# Altium PCB PCB_Program Counter - 2.0_2021-10-28.pcbdoc
Units mm, origin at the board's own origin, x right, y up, seen from the top; angles counter-clockwise.
Board outline 124.59 x 83.95 mm, 2 copper layers (Top Layer, Bottom Layer); 15 components, 27 nets, 72 pads, 11 vias.
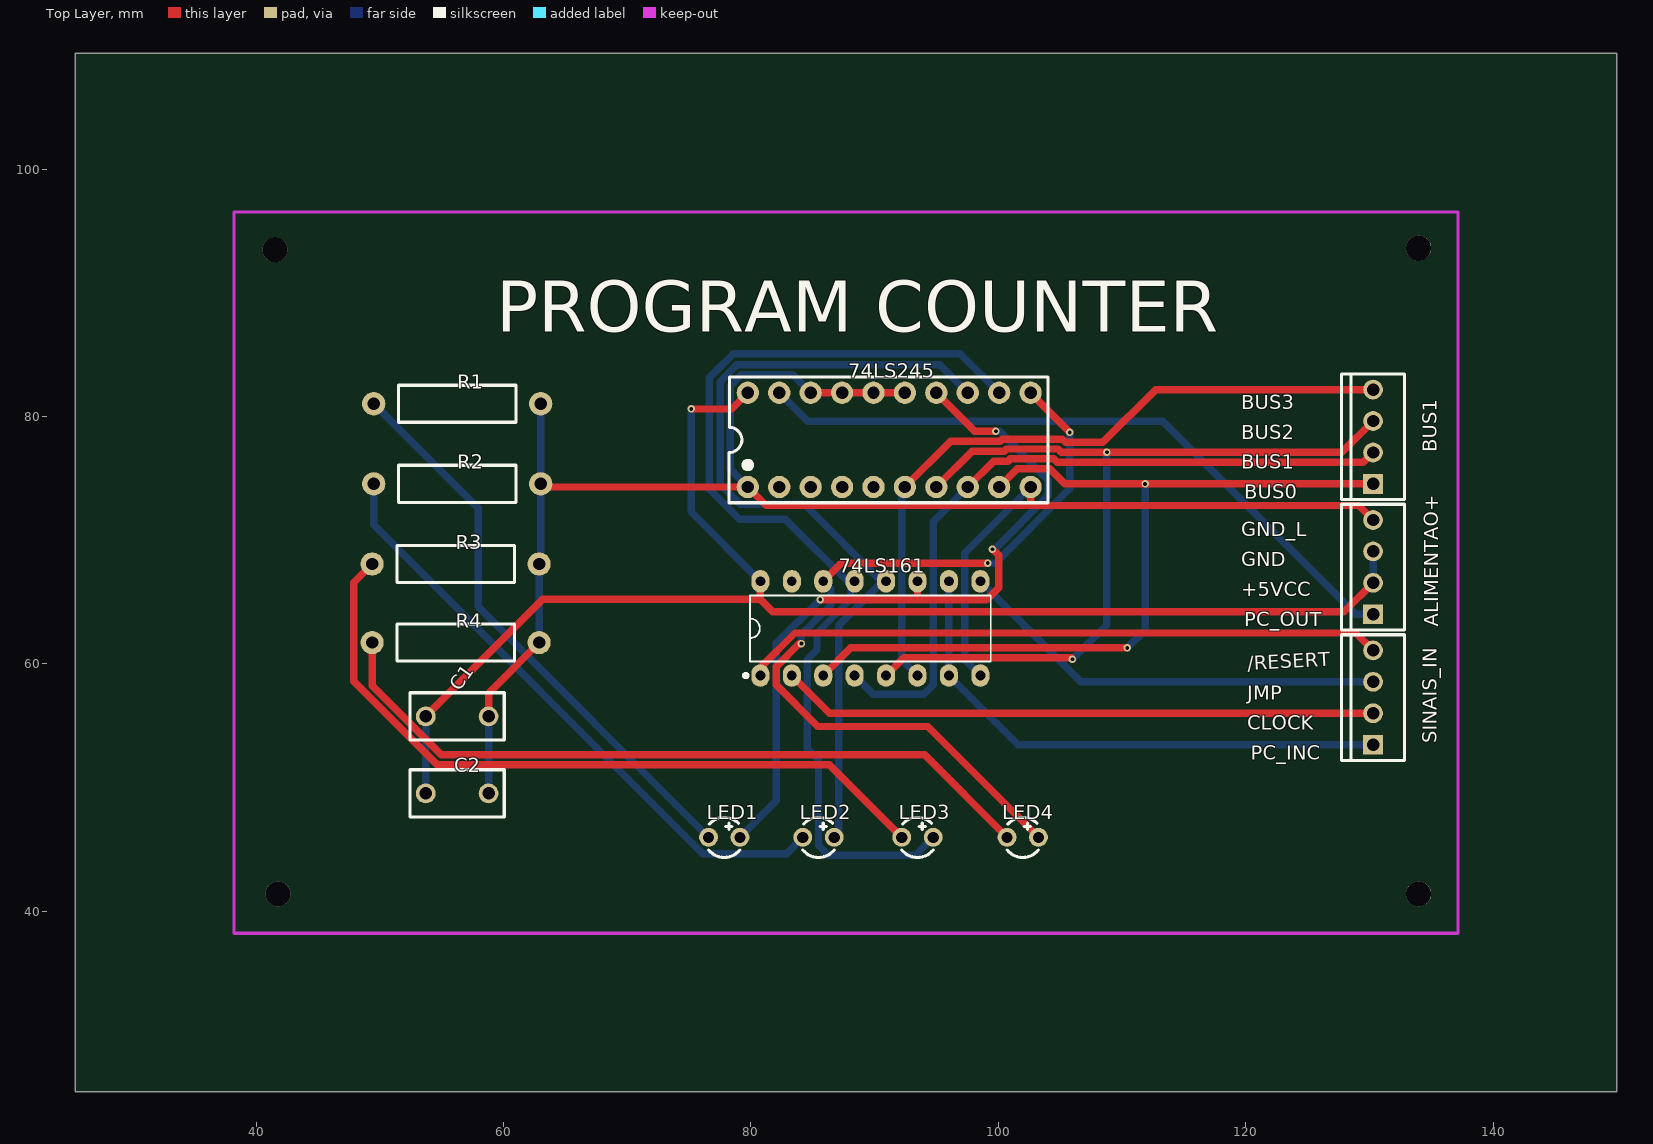
[diagram p0: Top Layer view]
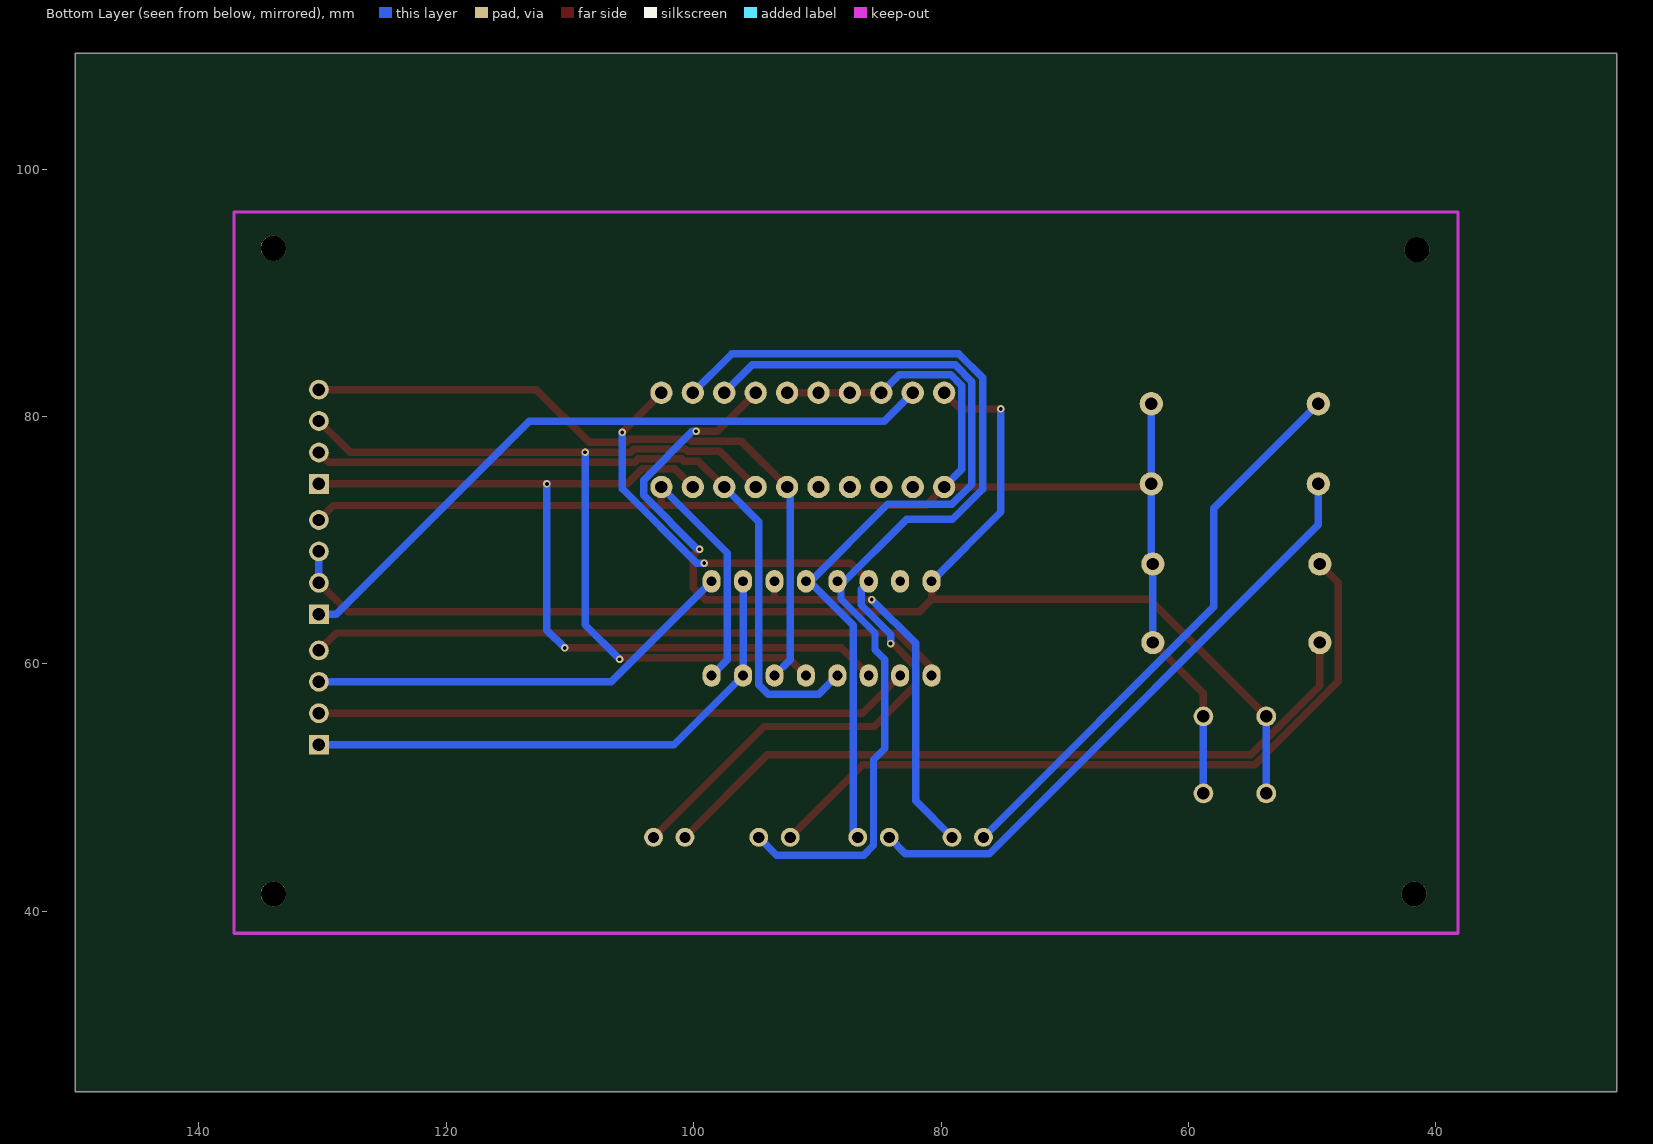
[diagram p1: Bottom Layer view, seen from below]

## Layer stack, top to bottom
Top Layer: signal copper (thickness not stored)
Dielectric: dielectric 0.32, FR-4, Dk 4.8
Bottom Layer: signal copper (thickness not stored)

## Board outline
149.987,25.4 25.4,25.4 25.4,109.347 149.987,109.347

## Components (designator, comment, footprint, x,y, rotation, side; value= is the part's Value field where it differs from the comment)
74LS161 "XD74LS161" DIP-16_L19.2-W6.6-P2.54-LS7.6-BL 89.662,62.865 r0 top
74LS245 "SN74LS245N" DIP-20_L25.5-W10.0-P2.54-LS7.6-BL 91.186,78.105 r0 top
ALIMENTAO+ "171825-4" HDR-TH_4P-P2.54-D1.0 130.302,67.818 r90 top
BUS1 "BUS" HDR-TH_4P-P2.54-D1.0 130.302,78.359 r90 top
C1 "100nF 63V" CAP-TH_L7.6-W3.8-P5.08-D0.51 56.261,55.753 r0 top
C2 "100nF 63V" CAP-TH_L7.6-W3.8-P5.08-D0.51 56.261,49.53 r0 top
LED1 "VERDE" LED-TH_BD3.0-P2.54-RD-GREEN 77.851,45.974 r0 top
LED2 "VERDE" LED-TH_BD3.0-P2.54-RD-GREEN 85.471,45.974 r0 top
LED3 "VERDE" LED-TH_BD3.0-P2.54-RD-GREEN 93.472,45.974 r0 top
LED4 "VERDE" LED-TH_BD3.0-P2.54-RD-GREEN 101.981,45.974 r0 top
R1 "470" RES-TH_BD3.0-L9.5-P13.50-D0.6 56.261,81.026 r0 top
R2 "470" RES-TH_BD3.0-L9.5-P13.50-D0.6 56.261,74.549 r0 top
R3 "470" RES-TH_BD3.0-L9.5-P13.50-D0.6 56.134,68.072 r0 top
R4 "470" RES-TH_BD3.0-L9.5-P13.50-D0.6 56.134,61.722 r0 top
SINAIS_IN "SINAIS IN" HDR-TH_4P-P2.54-D1.0 130.302,57.277 r90 top

## Footprints (in the part's own frame and the unit in brackets; to place one, negate y for a bottom-side part, rotate by r counter-clockwise, add the part's x,y. Pads: shape width x height; smd on the part's side, far side on the other; paste and mask are expansions set on the pad)
CAP-TH_L7.6-W3.8-P5.08-D0.51 [mm]
  round 1.6 hole 1: 1(-2.54,0) 2(2.54,0)
  silkscreen extent -3.81,-1.91 3.81,1.91
DIP-16_L19.2-W6.6-P2.54-LS7.6-BL [mm]
  oval 1.46x1.825 hole 0.8: 1(-8.89,-3.81) 2(-6.35,-3.81) 3(-3.81,-3.81) 4(-1.27,-3.81) 5(1.27,-3.81) 6(3.81,-3.81) 7(6.35,-3.81) 8(8.89,-3.81) 9(8.89,3.81) 10(6.35,3.81) 11(3.81,3.81) 12(1.27,3.81) 13(-1.27,3.81) 14(-3.81,3.81) 15(-6.35,3.81) 16(-8.89,3.81)
  silkscreen extent -10.22,-3.96 9.73,2.67
DIP-20_L25.5-W10.0-P2.54-LS7.6-BL [mm]
  round 1.8 hole 1: 1(-11.43,-3.81) 2(-8.89,-3.81) 3(-6.35,-3.81) 4(-3.81,-3.81) 5(-1.27,-3.81) 6(1.27,-3.81) 7(3.81,-3.81) 8(6.35,-3.81) 9(8.89,-3.81) 10(11.43,-3.81) 11(11.43,3.81) 12(8.89,3.81) 13(6.35,3.81) 14(3.81,3.81) 15(1.27,3.81) 16(-1.27,3.81) 17(-3.81,3.81) 18(-6.35,3.81) 19(-8.89,3.81) 20(-11.43,3.81)
  silkscreen extent -12.95,-5.08 12.83,5.08
HDR-TH_4P-P2.54-D1.0 [mm]
  rect 1.6x1.6 hole 1: 1(-3.81,0)
  round 1.6 hole 1: 2(-1.27,0) 3(1.27,0) 4(3.81,0)
  silkscreen extent -5.08,-2.54 5.08,2.54
LED-TH_BD3.0-P2.54-RD-GREEN [mil]
  round 60 hole 35.43: 1(-50,0) 2(50,0)
  silkscreen extent -50,-64 50,64
RES-TH_BD3.0-L9.5-P13.50-D0.6 [mm]
  round 1.88 hole 1: 1(-6.75,0) 2(6.75,0)
  silkscreen extent -4.75,-1.5 4.75,1.5

## Free pads (board coordinates)
  round 2.032 hole 2.032 unplated: ""(41.529,93.472) ""(41.783,41.402) ""(133.985,41.402) ""(133.985,93.599)

## Via types
v1: diameter 0.61, hole 0.305, Top Layer to Bottom Layer, 11 vias

## Nets (pads, with @x,y where several pads share a name; then routed paths per layer and width w, separated by ;. In a path a pad name is that pad's centre, name@x,y a point inside that pad or via, vN(x,y) a via of type N, cw(c..) or ccw(c..) an arc to the next point about the centre after c; other vN are vias at no path point)
+5V: 74LS161.16 74LS245.20 ALIMENTAO+.2 ALIMENTAO+.3 C1.1 C2.1 | length 113.5
  Top Layer w0.6: C1.1 63.18,65.212 80.772,65.212 ; v1(75.175,80.604) 78.445,80.604 74LS245.20 ; 74LS161.16 80.772,65.212 ; ALIMENTAO+.2 127.951,64.197 81.787,64.197 80.772,65.212
  Bottom Layer w0.6: C2.1 C1.1 ; v1(75.175,80.604) 75.175,72.272 74LS161.16 ; ALIMENTAO+.2 ALIMENTAO+.3
GND: 74LS161.8 74LS245.1 74LS245.10 74LS245.15 74LS245.16 74LS245.17 74LS245.18 ALIMENTAO+.4 C1.2 C2.2 R1.2 R2.2 R3.2 R4.2 | length 145.1
  Top Layer w0.6: C1.2 58.801,57.639 R4.2@62.884,61.722 ; R2.2@63.011,74.549 63.265,74.295 74LS245.1 81.253,72.798 102.616,72.798 ; 74LS245.18 74LS245.17 74LS245.16 74LS245.15 ; 74LS245.10 102.616,72.798 ; ALIMENTAO+.4 129.132,72.798 102.616,72.798
  Bottom Layer w0.6: C2.2 C1.2 ; R4.2@62.884,61.722 62.884,68.072 63.011,68.199 63.011,74.549 R1.2@63.011,81.026 ; 74LS245.1 78.33,75.721 78.33,82.482 79.209,83.361 83.39,83.361 74LS245.18 ; 74LS161.8 97.282,60.325 97.282,68.961 74LS245.10
LED1_1: LED1.1 R1.1 | length 46.3
  Bottom Layer w0.6: R1.1@49.511,81.026 57.954,72.583 57.954,64.601 LED1.1
LED2_1: LED2.1 R2.1 | length 49.5
  Bottom Layer w0.6: R2.1@49.511,74.549 49.511,71.246 76.094,44.664 82.891,44.664 LED2.1
LED3_1: LED3.1 R3.1 | length 59.6
  Top Layer w0.6: R3.1@49.384,68.072 47.887,66.575 47.887,58.603 54.652,51.838 86.338,51.838 LED3.1
LED4_1: LED4.1 R4.1 | length 59.9
  Top Layer w0.6: R4.1 49.384,58.241 54.984,52.641 94.044,52.641 LED4.1
S$31: 
S$33: 
S$35: 
U1_1: 74LS161.1 SINAIS_IN.4 | length 51.9
  Top Layer w0.6: 74LS161.1 80.772,59.694 83.57,62.492 128.897,62.492 SINAIS_IN.4
U1_2: 74LS161.2 SINAIS_IN.2 | length 48.3
  Top Layer w0.6: 74LS161.2 86.36,56.007 SINAIS_IN.2
U1_3: 74LS161.3 74LS245.9 BUS1.1 | length 70.7
  Top Layer w0.6: 74LS161.3 88.085,61.288 v1(110.431,61.288) ; 74LS245.9 101.544,75.763 104.173,75.763 105.386,74.549 v1(111.874,74.549) 128.9,74.549 BUS1.1
  Bottom Layer w0.6: v1(110.431,61.288) 111.874,62.73 v1(111.874,74.549)
U1_4: 74LS161.4 74LS245.8 BUS1.2 | length 58.6
  Top Layer w0.6: 74LS245.8 99.631,76.39 100.811,76.39 100.987,76.566 104.505,76.566 104.781,76.29 129.503,76.29 BUS1.2
  Bottom Layer w0.6: 74LS161.4 89.895,57.552 93.987,57.552 94.742,58.307 94.742,71.501 74LS245.8
U1_5: 74LS161.5 74LS245.7 BUS1.3 | length 71.3
  Top Layer w0.6: 74LS161.5 92.362,60.485 105.89,60.485 v1(105.997,60.379) ; 74LS245.7 97.894,77.193 100.479,77.193 100.655,77.369 104.837,77.369 105.109,77.097 v1(108.788,77.097) 127.77,77.097 BUS1.3
  Bottom Layer w0.6: v1(105.997,60.379) 108.788,63.17 v1(108.788,77.097)
U1_6: 74LS161.6 74LS245.6 BUS1.4 | length 57.2
  Top Layer w0.6: 74LS245.6 96.157,77.996 100.147,77.996 100.323,78.172 105.169,78.172 105.441,77.9 108.45,77.9 112.719,82.169 BUS1.4
  Bottom Layer w0.6: 74LS245.6 92.202,74.041 92.202,60.325 74LS161.6
U1_7: 74LS161.7 74LS161.10 SINAIS_IN.1 | length 44.2
  Bottom Layer w0.6: 74LS161.10 74LS161.7 101.6,53.467 SINAIS_IN.1
U1_9: 74LS161.9 SINAIS_IN.3 | length 35.1
  Bottom Layer w0.6: 74LS161.9 106.68,58.547 SINAIS_IN.3
U1_11: 74LS161.11 74LS245.14 LED1.2 | length 61.1
  Top Layer w0.6: v1(85.605,65.194) 93.472,65.194 ; 74LS161.11 93.472,65.194 ; 74LS245.14 98.108,78.803 v1(99.813,78.803) ; v1(99.534,69.271) 100.039,68.766 100.039,66.145 99.087,65.194 93.472,65.194
  Bottom Layer w0.6: LED1.2 82.066,48.919 82.066,61.655 v1(85.605,65.194) ; v1(99.534,69.271) 99.705,69.271 104.056,73.622 104.056,74.856 100.109,78.803 v1(99.813,78.803)
U1_12: 74LS161.12 74LS245.13 LED2.2 | length 68.7
  Bottom Layer w0.6: LED2.2 87.122,46.355 87.122,63.135 90.557,66.57 74LS161.12@90.557,66.675 ; 74LS161.12 74LS161.12@90.557,66.675 ; 74LS245.13 95.288,84.163 78.877,84.163 77.527,82.814 77.527,74.497 79.132,72.893 84.339,72.893 74LS161.12@90.557,66.675
U1_13: 74LS161.13 74LS245.12 LED3.2 | length 82.7
  Bottom Layer w0.6: 74LS161.13 74LS161.13@88.096,66.379 ; LED3.2 93.309,44.541 86.257,44.541 85.471,45.327 85.471,52.237 84.544,53.163 84.544,60.326 85.347,61.129 85.347,62.495 88.096,65.244 74LS161.13@88.096,66.379 ; 74LS245.12 96.94,85.051 78.574,85.051 76.646,83.122 76.646,74.13 79.086,71.69 82.786,71.69 74LS161.13@88.096,66.379
U1_14: 74LS161.14 74LS245.11 LED4.2 | length 69
  Top Layer w0.6: v1(84.088,61.642) 83.926,61.642 82.042,59.758 82.042,58.313 85.42,54.935 94.29,54.935 LED4.2 ; 74LS161.14 87.32,68.143 v1(99.145,68.143) ; 74LS245.11 102.616,81.866 v1(105.775,78.707)
  Bottom Layer w0.6: v1(84.088,61.642) 84.088,62.371 86.474,64.757 86.474,66.053 74LS161.14 ; v1(99.145,68.143) 99.747,68.143 105.775,74.171 v1(105.775,78.707)
U1_15: 74LS161.15
U2_2: 74LS245.2
U2_3: 74LS245.3
U2_4: 74LS245.4
U2_5: 74LS245.5
U2_19: 74LS245.19 ALIMENTAO+.1 | length 55.4
  Bottom Layer w0.6: 74LS245.19 84.601,79.61 113.298,79.61 128.9,64.008 ALIMENTAO+.1

## Silkscreen, mask and mechanical layers (free items; w line width, h text height)
Top Overlay:
  text "PROGRAM COUNTER" at 59.436,86.829 h4.14
  text "BUS3" at 119.634,80.581 h1.14
  text "BUS2" at 119.634,78.168 h1.14
  text "BUS1" at 119.634,75.755 h1.14
  text "BUS0" at 119.888,73.343 h1.14
  text "GND_L" at 119.634,70.294 h1.14
  text "GND" at 119.634,67.882 h1.14
  text "+5VCC" at 119.634,65.468 h1.14
  text "PC_OUT" at 119.888,63.055 h1.14
  text "/RESERT" at 120.172,59.5 h1.14 r3
  text "JMP" at 120.142,57.087 h1.14
  text "CLOCK" at 120.142,54.673 h1.14
  text "PC_INC" at 120.396,52.261 h1.14